# Altium PCB PCB2.PCBDOC
Units mil, origin at the board's own origin, x right, y up, seen from the top; angles counter-clockwise.
Board outline 2055.03 x 2170.03 mil, 2 copper layers (Top Layer, Bottom Layer); 23 components, 14 nets, 76 pads, 0 vias.
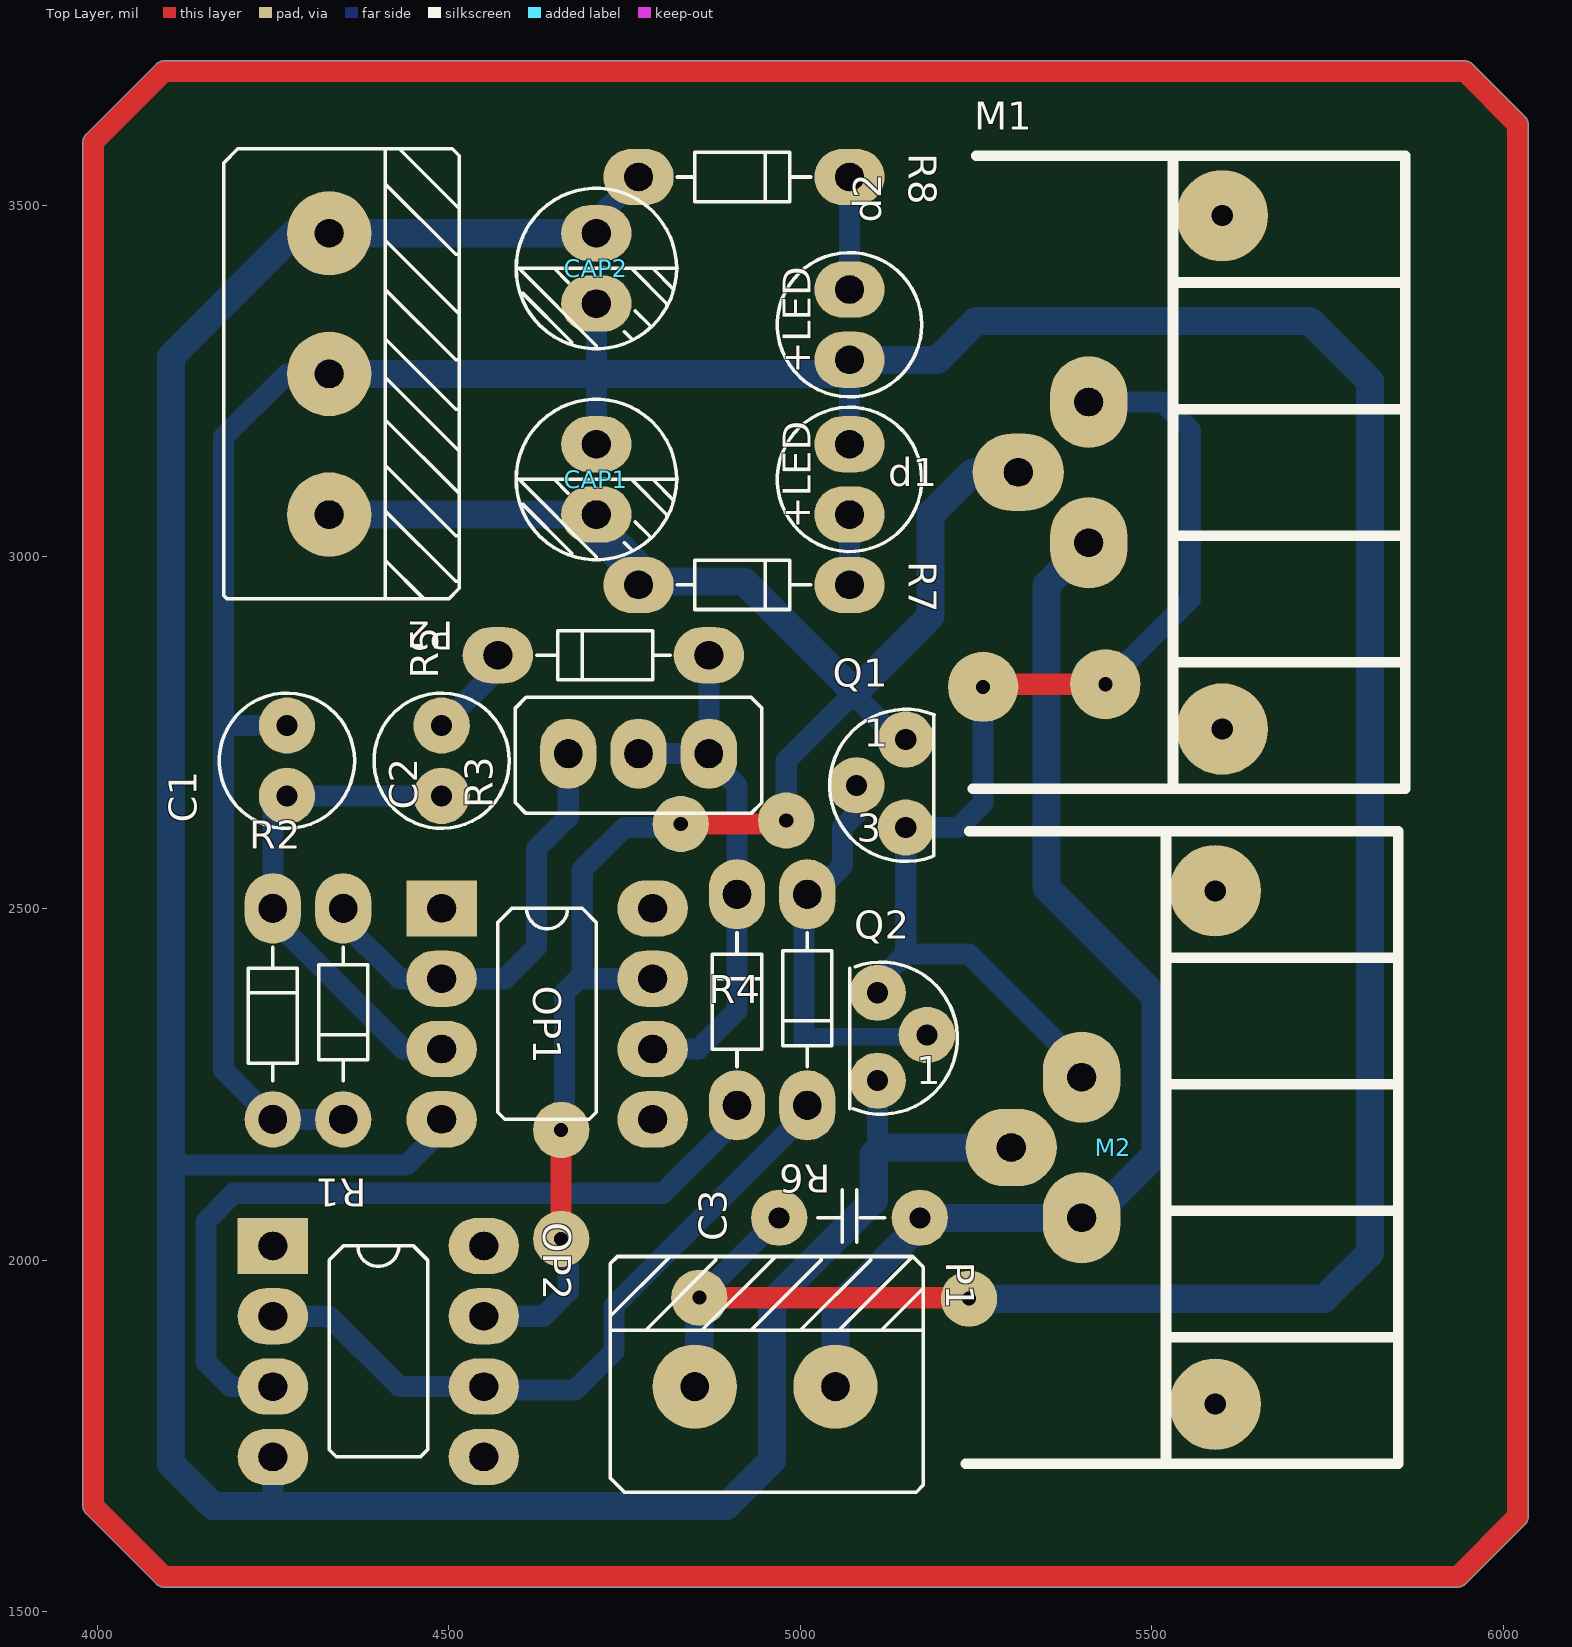
[diagram p0: Top Layer view]
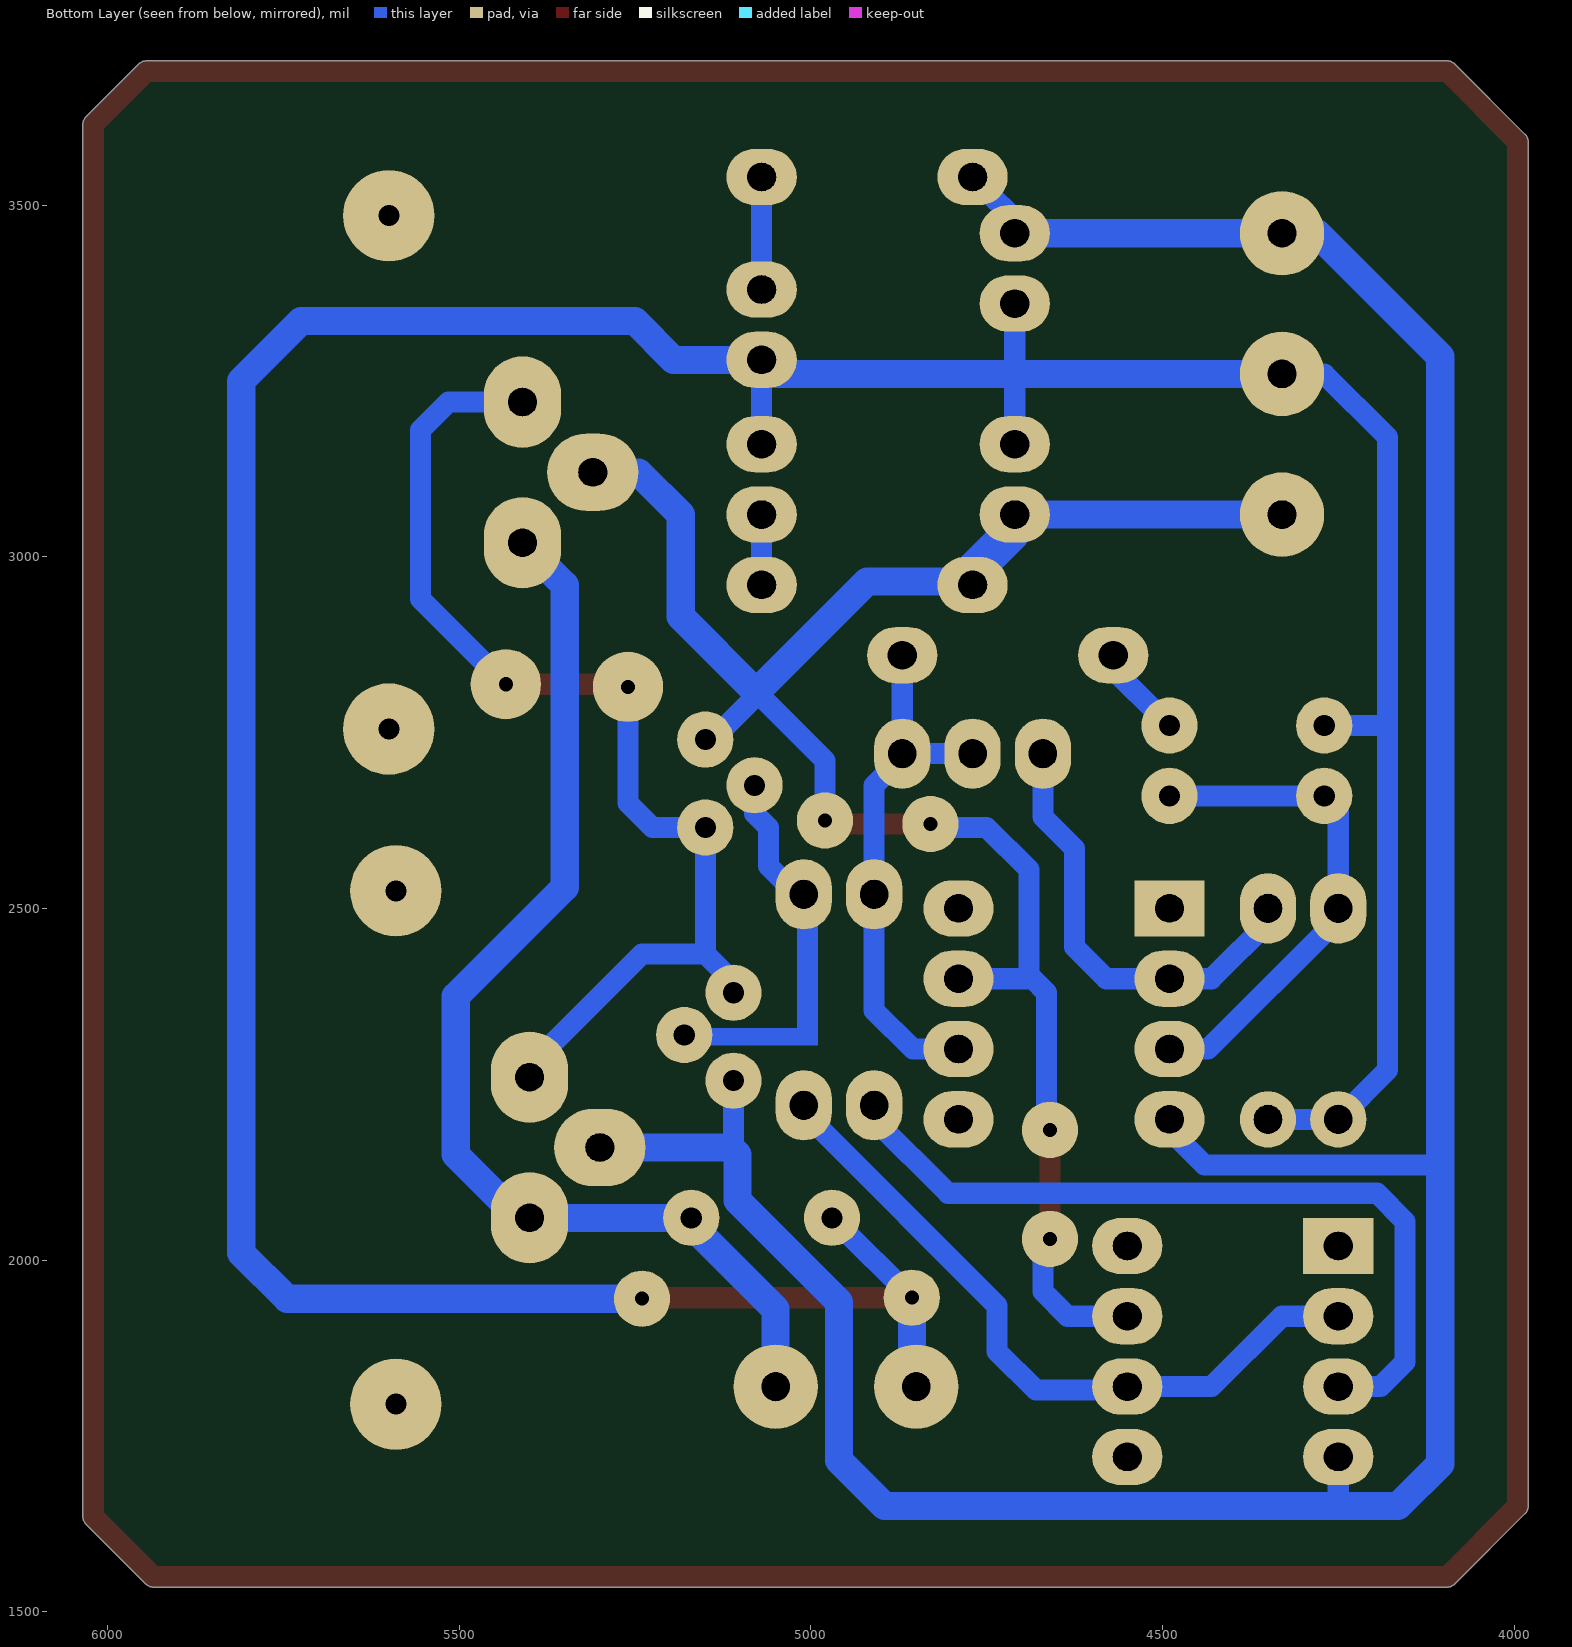
[diagram p1: Bottom Layer view, seen from below]

## Layer stack, top to bottom
Top Layer: signal copper 1.4
Dielectric: dielectric 12.6, FR-4, Dk 4.8
Bottom Layer: signal copper 1.4

## Board outline
3979.99,1650 ccw(c3995,1650) 3984.4,1639.37 3984.38,1639.38 4084.38,1539.38 4084.37,1539.4 ccw(c4095,1550) 4095,1534.98 5935,1534.98 ccw(c5935,1550) 5945.63,1539.4 5945.62,1539.38 6030.62,1624.38 6030.6,1624.37 ccw(c6020,1635) 6035.02,1635 6035.02,3615 ccw(c6020,3615) 6030.6,3625.63 6030.62,3625.62 5955.62,3700.62 5955.63,3700.6 ccw(c5945,3690) 5945,3705.01 4095,3705.01 ccw(c4095,3690) 4084.37,3700.6 4084.38,3700.62 3984.38,3600.62 3984.4,3600.63 ccw(c3995,3590) 3979.99,3590

## Design rules (kind name [scope] priority, off if disabled: settings)
Clearance [All] p1: gap=10
ComponentClearance [All] p1: gap=10 collisioncheckmode=3 verticalgap=10
PolygonConnect [All] p1: connectstyle=Relief reliefconductorwidth=10 reliefentries=4 polygonreliefangle="90 Angle"
RoomDefinition Sheet2 [InComponentClass('Sheet2')] p1: confinementstyle=ConfineIn formatcopy=TRUE lockcomponents=FALSE outline 0,0 2000,0 2000,1000 0,1000
RoutingVias [All] p1: holewidth=28 width=50 viastyle="Through Hole" minholewidth=28 minwidth=50 maxholewidth=28 maxwidth=50
SolderMaskExpansion [All] p1: expansion=4
TestPointUsage [All] p1: valid=0 allowmultiple=FALSE
Testpoint [All] p1: side=15 testpointundercomponent=TRUE minsize=40 maxsize=100 preferedsize=60 minholesize=0 maxholesize=40 preferedholesize=32 testpointgrid=1 style=1023 order=0123456789
Width [All] p1: maxlimit=40 minlimit=40 preferedwidth=40
18 further rules are at their usual default settings.

## Components (designator, comment, footprint, x,y, rotation, side; value= is the part's Value field where it differs from the comment)
C1 "Cap" Cap 4270,2660 r90 top
C2 "Cap" Cap 4490,2660 r90 top
C3 "Cap" C 5170,2060 r180 top
CAP1 "电解小电容" 电解小电容 4710,3160 r270 top
CAP2 "电解小电容" 电解小电容 4710,3460 r270 top
d1 "LED" LED 5070,3060 r90 top
d2 "LED" LED 5070,3280 r90 top
M1 "MOS" MOS1 5410,3220 r0 top
M2 "MOS-P" MOS-P 5400,2260 r0 top
OP1 "OP" OP 4490,2500 r0 top
OP2 "OP" OP 4250,2020 r0 top
P1 "双孔压线器" 双孔压线器 4850,1820 r0 top
P2 "三脚压线器" 三脚压线器 4330,3460 r270 top
Q1 "NPN" "npn - duplicate" 5150,2740 r0 top
Q2 "PNP" "pnp - duplicate" 5110,2380 r0 top
R1 "电阻" 电阻#1 4350,2500 r270 top
R2 "电阻" 电阻#2 4250,2200 r90 top
R3 "滑动变阻器" 滑动变阻器 4870,2720 r180 top
R4 "电阻" 电阻#3 4910,2220 r90 top
R5 "电阻" 电阻#3 4870,2860 r180 top
R6 "电阻" 电阻#3 5010,2520 r270 top
R7 "电阻" 电阻#3 4770,2960 r0 top
R8 "电阻" 电阻#3 4770,3540 r0 top

## Footprints (in the part's own frame and the unit in brackets; to place one, negate y for a bottom-side part, rotate by r counter-clockwise, add the part's x,y. Pads: shape width x height; smd on the part's side, far side on the other; paste and mask are expansions set on the pad)
C [mil]
  round 80 hole 30: 1(0,0) 2(200,0)
  silkscreen extent 50,-40 145,35
Cap [mil]
  round 80 hole 30: 1(0,0) 2(100,0)
  silkscreen extent -46,-96 146,96
LED [mil]
  oval 80x100 hole 40 slot 41 at 90 deg: 1(0,0) 2(100,0)
  silkscreen extent -53,-103 153,102
MOS1 [mil]
  oval 130x110 hole 40 slot 41 at 0 deg: 1(-100,-100)
  oval 110x130 hole 40 slot 41 at 0 deg: 2(0,0) 3(0,-200)
  round 130 hole 30: " "(190,-465) " "(190,265)
  silkscreen extent -165,-555 450,350
MOS-P [mil]
  oval 130x110 hole 40 slot 41 at 0 deg: 1(-100,-100)
  oval 110x130 hole 40 slot 41 at 0 deg: 2(0,0) 3(0,-200)
  round 130 hole 30: " "(190,-465) " "(190,265)
  silkscreen extent -165,-555 450,350
"npn - duplicate" [mil]
  round 80 hole 30: 1(0,0) 2(-70,-65) 3(0,-125)
  silkscreen extent -108,-173 40,43
OP [mil]
  oval 100x80 hole 40 slot 41 at 0 deg: 1(0,-100) 2(0,-200) 3(0,-300) 4(300,-100) 5(300,-200) " "(300,-300) ""(300,0)
  rect 100x80 hole 40 slot 41 at 0 deg: " "(0,0)
  silkscreen extent 80,-300 220,0
"pnp - duplicate" [mil]
  round 80 hole 30: 1(0,-125) 2(70,-60) 3(0,0)
  silkscreen extent -40,-173 113,44
三脚压线器 [mil]
  round 120 hole 40 slot 41 at 90 deg: 0(0,0) 1(200,0) 2(400,0)
  silkscreen extent -120,-150 520,185
双孔压线器 [mil]
  round 120 hole 40 slot 41 at 90 deg: 0(0,0) 1(200,0)
  silkscreen extent -120,-150 325,185
滑动变阻器 [mil]
  oval 80x100 hole 40 slot 41 at 90 deg: 1(0,0) 2(200,0) 3(100,0)
  silkscreen extent -75,-80 275,85
电解小电容 [mil]
  oval 80x100 hole 40 slot 41 at 90 deg: 1(0,0) 2(100,0)
  silkscreen extent -64,-114 164,115
电阻#1 [mil]
  round 80 hole 40 slot 41 at 0 deg: 1(300,0)
  oval 100x80 hole 40 slot 41 at 0 deg: 2(0,0)
  silkscreen extent 55,-35 245,35
电阻#2 [mil]
  oval 100x80 hole 40 slot 41 at 0 deg: 1(300,0)
  round 80 hole 40 slot 41 at 0 deg: 2(0,0)
  silkscreen extent 55,-35 245,35
电阻#3 [mil]
  oval 100x80 hole 40 slot 41 at 0 deg: 1(300,0) 2(0,0)
  silkscreen extent 55,-35 245,35

## Free pads (board coordinates)
  round 100 hole 20: 0(5433.73,2818.73) 1(5260,2815)
  round 80 hole 20: 2(4980,2625) 3(4830,2620) 4(4660,2030) 5(4660,2185) 6(5240,1945) 7(4856.41,1946.41)

## Nets (pads, with @x,y where several pads share a name; then routed paths per layer and width w, separated by ;. In a path a pad name is that pad's centre, name@x,y a point inside that pad or via, vN(x,y) a via of type N, cw(c..) or ccw(c..) an arc to the next point about the centre after c; other vN are vias at no path point)
+12: CAP1.2 M1.1 OP1.4 OP2.4 P2.2 pad.2 pad.3 pad.4 pad.5 Q1.1 R7.2 | length 4036.1
  Top Layer w30: pad.4 pad.5 ; pad.3 pad.2@4965,2620
  Bottom Layer w30: P2.2 4705,3060 4805,2960 4920,2960 5140,2740 Q1.1 ; OP2.4 4635,1920 4670,1955 pad.4@4670,2050 ; pad.5@4650,2170 4665,2185 4665,2380 4685,2400 OP1.4 ; 4690,2400 4690,2555 4750,2615 4810,2615 pad.3@4820,2605 ; pad.2 4980,2710 5185,2915 5185,3060 5245,3120 M1.1
  Bottom Layer w40: P2.2@4350,3060 CAP1.2 4710,3030 4775,2965 4920,2965 5076.61,2808.39 5078.39,2808.39 5185,2915 5185,3060 M1.1@5245,3120
-12: CAP2.1 M2.1 OP1.3 OP2.3 P2.0 Q2.1 R8.2 | length 4573.3
  Bottom Layer w30: 4105,2135 4440,2135 4490,2185 OP1.3 ; 4250,1655 OP2.3 ; CAP2.1@4690,3460 R8.2 ; 5110,2155.62 Q2.1 ; M2.1@5295,2155 M2.1@5310,2140
  Bottom Layer w40: CAP2.1 4280,3460 4105,3285 4105,1710 4165,1650 4895,1650 4960,1715 4960,1940 5104.38,2084.38 5104.38,2150 5114.38,2160 M2.1
GND: C1.2 C3.2 CAP1.1 CAP2.2 d1.2 d2.1 P1.0 P2.1 pad.6 pad.7 R1.1 R2.2 | length 5731.8
  Top Layer w30: pad.7 pad.6@5240,1946.41
  Bottom Layer w30: 4195,2760 C1.2 ; P2.1 4270,3260 4180,3170 4180,2270 R2.2 R1.1 ; CAP1.1 CAP2.2 ; P1.0 P1.0@4850,1840 ; pad.7@4850,1940 C3.2 ; d1.2 d2.1@5070,3265 ; pad.6 pad.6@5250,1945
  Bottom Layer w40: P2.1 5055,3260 5075,3280 5195,3280 5250,3335 5725,3335 5810,3250 5810,2010 5745,1945 pad.6@5250,1945 ; P1.0@4850,1840 4856.41,1846.41 pad.7
NetC1_1: C1.1 C2.1 OP1.2 R2.1 | length 697.8
  Bottom Layer w30: R2.1 4250,2640 C1.1 C2.1 ; R2.1@4255,2480 4435,2300 OP1.2
NetC2_2: C2.2 R5.1 | length 137.3
  Bottom Layer w30: C2.2 4580,2850 R5.1@4580,2860
NetC3_1: C3.1 M1.3 M2.3 P1.1 | length 1859.3
  Bottom Layer w30: P1.1@5040,1820 P1.1@5050,1830 ; C3.1 M2.3
  Bottom Layer w40: P1.1 5050,1930 5180,2060 5415,2060 5505,2150 5505,2375 5350,2530 5350,2960 M1.3
Netd1_1: d1.1 R7.1 | length 110
  Bottom Layer w30: R7.1@5070,2950 d1.1
Netd2_2: d2.2 R8.1 | length 160
  Bottom Layer w30: d2.2 R8.1
NetM1_2: M1.2 M2.2 pad.0 pad.1 Q1.3 Q2.3 | length 1629.4
  Top Layer w30: pad.1@5275,2825 5281.27,2818.73 pad.0
  Bottom Layer w30: Q2.3@5100,2385 5150,2435 ; pad.1 5260,2650 5225,2615 Q1.3 5150,2435 ; M2.2@5410,2260 5410,2265 5240,2435 5150,2435 ; M1.2 5515,3220 5555,3180 5555,2940 pad.0@5420,2805
NetOP1_1: OP1.1 R1.2 R3.2 | length 627.5
  Bottom Layer w30: R1.2@4345,2485 4430,2400 4580,2400 4625,2445 4625,2585 4670,2630 R3.2
NetOP1_5: OP1.5 R3.1 R3.3 R4.1 R5.2 | length 752.3
  Bottom Layer w30: R3.3 R3.1 R5.2 ; OP1.5 4855,2300 4910,2355 4910,2675 R3.1@4875,2710
NetOP2_1: OP2.1 OP2.5 R6.1 | length 984
  Bottom Layer w30: OP2.1 4330,1920 4430,1820 OP2.5 4555,1815 4680,1815 4735,1870 4735,1935 R6.1@4995,2195
NetOP2_2: OP2.2 R4.2 | length 1134.6
  Bottom Layer w30: OP2.2@4240,1820 4190,1820 4155,1855 4155,2055 4195,2095 4805,2095 4910,2200 R4.2
NetQ1_2: Q1.2 Q2.2 R6.2 | length 381.1
  Bottom Layer w30: 5005,2325 5005,2505 5060,2560 5060,2615 5080,2635 Q1.2
pads on no net: "M1. " "M2. " "OP1. " "OP2. " OP1. OP2.
copper on no net: | length 8129.1
  Top Layer w30: 4210,3690 5945,3690 6020,3615 6020,1635 5935,1550 4095,1550 3995,1650 3995,3590 4095,3690 4220,3690

## Other copper
Bottom Layer:
  rectangle net NetQ1_2: 4990,2305 5175,2330

## Text inside footprints (layer, text, board x,y; h text height)
d1: Top Overlay "+" at 5020,3080 h40 r180
d2: Top Overlay "+" at 5020,3300 h40 r180
Q1: Top Overlay "3" at 5080,2595 h40; Top Overlay "1" at 5090,2730 h40
Q2: Top Overlay "1" at 5165,2250 h40